# Altium PCB Booster_Channel_RF_HL.PcbDoc (part 2 of 3)
Units mm, origin at the board's own origin, x right, y up, seen from the top; angles counter-clockwise.
Board outline 159 x 28.5 mm, 2 copper layers (Top Layer, Bottom Layer), stack 1.063 mm thick; 161 components, 99 nets, 420 pads, 478 vias.
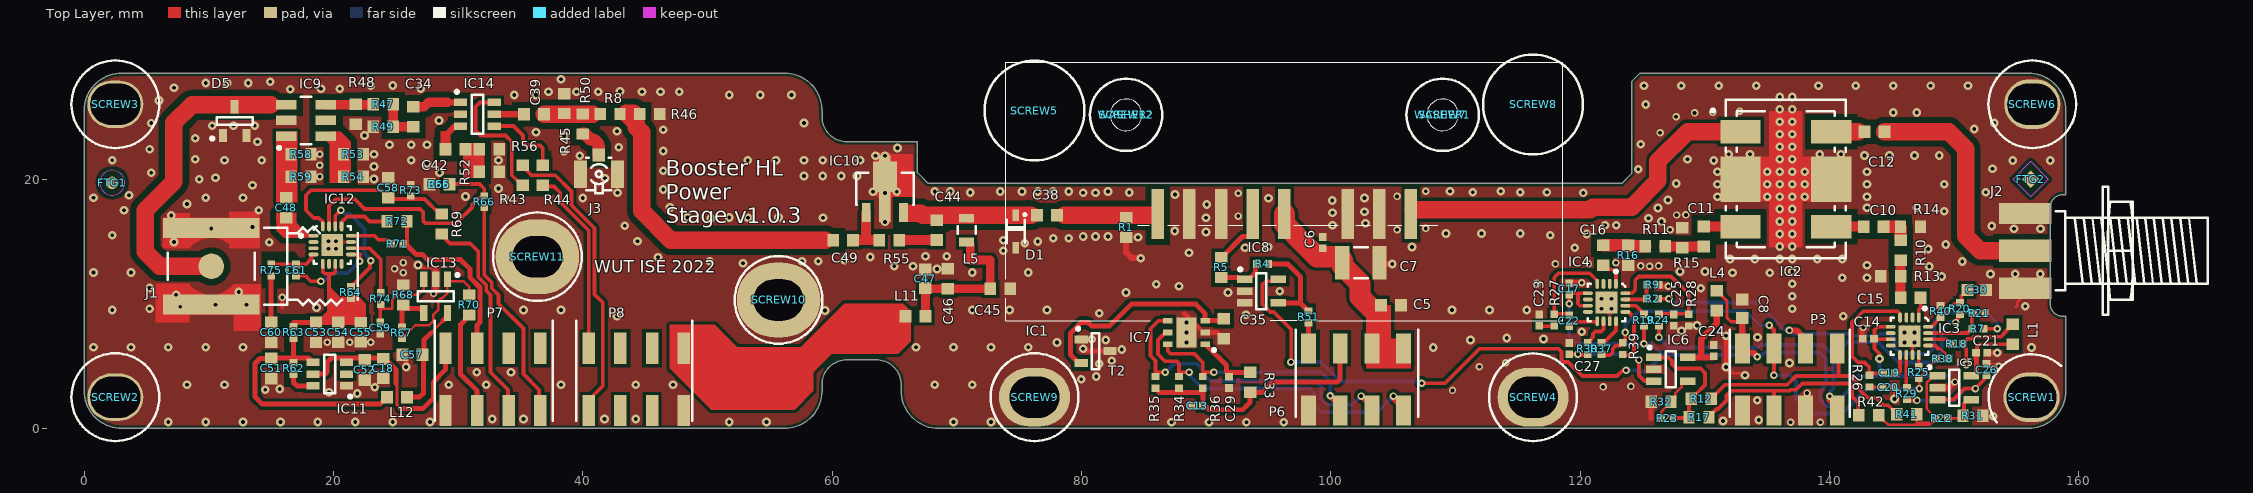
[diagram p0: Top Layer view]

## Part data (continued)
T2: "PNP Transistor", Case=SOT23-3, Manufacturer="ON SEMICONDUCTOR", Author="CERN DEM JLC", Bonding=No, ComponentHeight=1.1mm, Component Type=Standard, CreateDate=29.03.2012, Device=MMBT3906LT1G, HelpURL=\\cern.ch\dfs\Applications\Altium\Datasheets\MMBT3906LT1G.pdf, LatestRevisionDate=29.03.2012, Manufacturer Part Number=MMBT3906LT1G, Mounted=Yes, PackageDescription="SOT23 3-Leads, Pitch 0.95mm - Body 1.4x3mm, IPC Medium Density", Part Description="40V 200mA PNP General Purpose Transistor", Part Number=MMBT3906LT1G, Pin Count=3, PressFit=No, Sense=No, SMD=Yes, Socket=No
WASHER1 WASHER2: library part BOSSARD_BN678-8303525_v, "Washer", Manufacturer=BOSSARD, Manufacturer Part Number="BN678 Art.8303525", Author="CERN DEM JLC", Component Type=Mechanical, ComponentHeight=0.3mm, CreateDate=22.10.2012, HelpURL=\\cern.ch\dfs\Applications\Altium\Datasheets\BOSSARD_BN678-8303525.pdf, LatestRevisionDate=15.01.2013, Mounted=Yes, PackageDescription="Waved Spring Washer for M2.5 Screw, Stainless Steel A2 / 1.4310", Part Description="Waved Spring Washer for M2.5 Screw, Stainless Steel A2 / 1.4310", Part Number=BOSSARD_BN678-8303525_v, Pin Count=0, PressFit=No, Sense=No, SMD=No, Socket=No, Status=Obsolete, Status Comment="Replaced by BOSSARD_BN83728-8051127_v"

## Free pads (board coordinates)
  oval 4.5x3.8 hole 3.3 slot 4 at 0 deg mask+1: 0(2.478,2.5) 1(2.478,26)
  oval 4.5x4 hole 3.3 slot 4 at 0 deg mask+0.9: 1(156.228,2.49) 2(156.288,26)
  oval 5.7x4.7 hole 3.3 slot 4 at 0 deg mask+0.6: 2(76.228,2.5) 6(116.228,2.49)
  oval 6.7x6 hole 3.3 slot 4 at 0 deg: 4(36.348,13.77) 5(55.688,10.3)

## Via types
v1: diameter 0.7, hole 0.3, Top Layer to Bottom Layer, tented both sides, 400 vias
v2: diameter 0.6, hole 0.3, Top Layer to Bottom Layer, tented both sides, 78 vias

## Nets (pads, with @x,y where several pads share a name; then routed paths per layer and width w, separated by ;. In a path a pad name is that pad's centre, name@x,y a point inside that pad or via, vN(x,y) a via of type N, cw(c..) or ccw(c..) an arc to the next point about the centre after c; other vN are vias at no path point)
ADL_Q: P7.6 R71.1 R72.2 | length 14.6
  Top Layer w0.3: 25.878,14.8 R72.2@25.878,16.6
  Top Layer w0.4: R71.1@25.828,14.75 26.628,13.95 27.121,13.95 27.228,13.843 27.521,13.55 30.158,13.55 30.944,12.764 30.944,12.082 31.73,11.296 31.73,8.504 31.508,8.282 P7.6@31.508,6.5 ; P7.6@31.208,6.3 P7.6@31.208,6.5
ADL_RST: P7.1 R66.1 | length 18
  Top Layer w0.3: R66.1@32.078,17.71 32.078,12.299 32.685,11.691 32.685,11.239 33.228,10.696 33.228,10 35.228,8 35.228,4.35 36.478,3.1 P7.1@36.478,1.49
ADL_VREF: P7.3 R69.2 | length 17.2
  Top Layer w0.3: R69.2@28.678,15.6 28.678,15.465 29.318,14.825 30.953,14.825 31.593,14.185 31.593,12.144 32.233,11.504 32.233,11.052 32.578,10.707 32.578,4.5 33.978,3.1 P7.3@33.978,1.53
ALERT: IC7.6 P6.5 R36.2 | length 17.3
  Top Layer w0.3: IC7.6@86.928,6.75 86.928,6.19 87.125,5.993 89.025,5.993 89.728,5.29 89.728,4.49 v2(90.628,4.49) ; v2(99.958,2.62) 99.958,2.46 P6.5@100.628,1.79
  Bottom Layer w0.3: v2(90.628,4.49) 99.228,4.49 99.958,3.76 v2(99.958,2.62)
FWD_Q: P3.6 R25.1 R37.1 R38.1 R39.1 | length 38
  Top Layer w0.203: R25.1@147.178,4.01 147.213,3.975 v2(147.213,3.19) ; R25.1@147.328,4.01 147.328,4.14 147.799,4.611 147.799,4.741 148.637,5.58 R38.1@148.637,5.6
  Top Layer w0.3: R37.1@121.728,5.89 122.428,5.89 122.628,6.09 122.628,6.376 122.892,6.64 123.178,6.64 123.628,7.09 v2(123.628,7.69) ; v2(135.184,8.266) 135.556,7.894 135.556,6.092 135.558,6.09 v2(135.558,4.26) ; v2(147.213,3.19) v2@147.271,3.247
  Bottom Layer w0.3: v2(123.628,7.69) 123.628,8.29 124.728,9.39 133.288,9.39 134.412,8.266 v2(135.184,8.266) ; v2(135.558,4.26) 136.858,4.26 137.328,3.79 137.328,2.39 138.528,1.19 141.028,1.19 143.028,3.19 v2(147.213,3.19)
FWD_RST: P3.4 R2.2 R7.2 | length 35.8
  Top Layer w0.3: R2.2@126.328,10.39 v2(127.128,10.39) ; 152.728,7.99 v2(153.478,7.99)
  Top Layer w0.5: v2(136.798,7.85) 137.395,7.85 137.748,7.497 137.748,7 P3.4@138.128,6.62
  Bottom Layer w0.3: v2(127.128,10.39) 127.428,10.09 134.228,10.09 136.468,7.85 v2(136.798,7.85) 137.057,7.59 141.779,7.59 141.934,7.435 143.921,7.435 144.076,7.59 144.828,7.59 145.228,7.19 145.228,6.49 145.728,5.99 147.928,5.99 148.428,6.49 148.428,8.59 149.128,9.29 152.628,9.29 153.478,8.44 v2(153.478,7.99)
FWD_VREF: P3.1 R20.1 R24.1 | length 34
  Top Layer w0.3: v2(126.328,7.29) R24.1@126.328,8.19 ; v2(150.128,8.49) 150.128,8.59 R20.1@150.428,8.89
  Top Layer w0.5: v2(140.038,2.58) 140.038,2.28 P3.1@140.628,1.69
  Bottom Layer w0.3: v2(126.328,7.29) 127.128,6.49 134.328,6.49 134.528,6.69 139.452,6.69 140.328,5.814 ; v2(140.038,2.58) 140.038,2.91 140.328,3.2 140.328,5.814 ; v2(150.128,8.49) 149.575,8.49 149.028,7.943 149.028,6.178 148.14,5.29 145.528,5.29 143.886,6.932 141.445,6.932 140.328,5.814
FWD_VRMS: P3.5 R17.2 R42.1 | length 17.4
  Top Layer w0.3: R17.2@130.35,0.888 130.425,0.963 R17.2@130.4,0.988 ; R17.2@130.35,0.938 130.955,1.543 131.068,1.543 131.748,2.222 131.748,2.625 132.143,3.02 135.465,3.02 ; P3.5@135.558,1.37 135.558,2.928 135.465,3.02 ; R42.1@142.328,0.99 142.328,2.055 141.828,2.555 141.828,3.419 141.652,3.594 137.832,3.594 137.328,3.09 136.868,3.09 136.798,3.02 135.465,3.02